# Altium PCB PCB_BlocBatteries.PcbDoc
Units mil, origin at the board's own origin, x right, y up, seen from the top; angles counter-clockwise.
Board outline 3520 x 3375 mil, 2 copper layers (Top Layer, Bottom Layer); 159 components, 92 nets, 463 pads, 20 vias.
Unrouted connection lines stored in the file: 298.
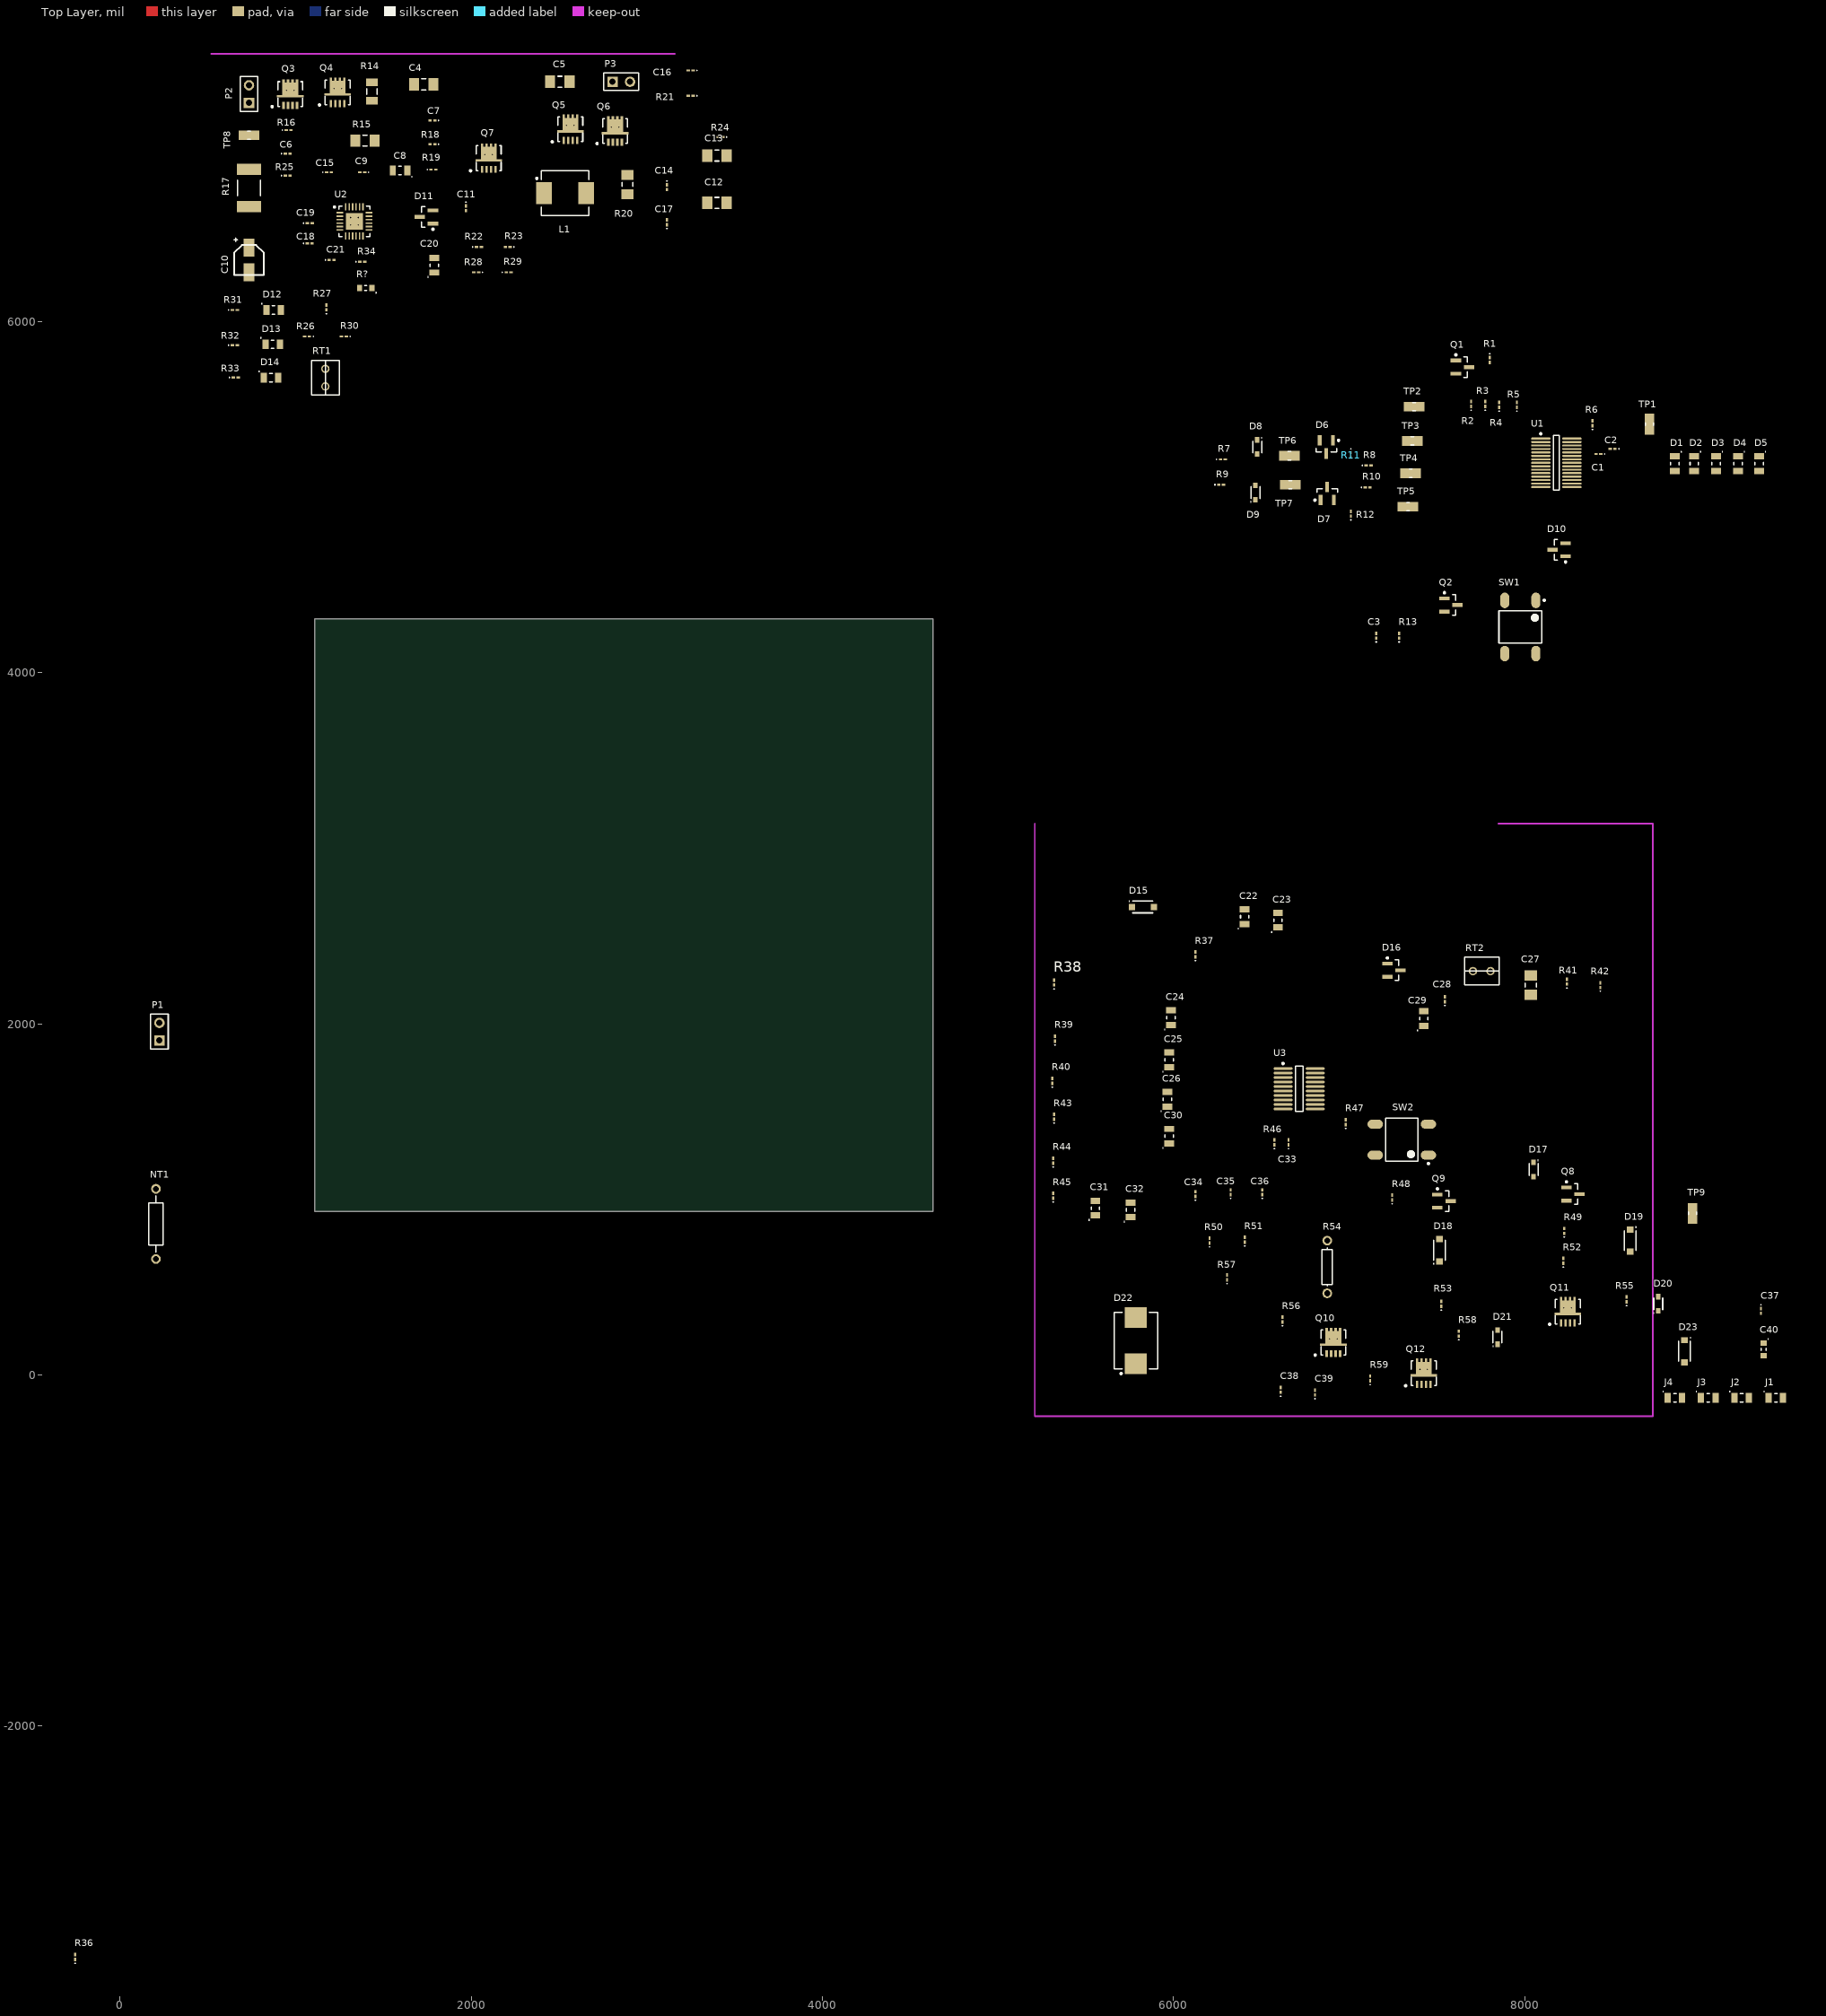
[diagram p0: Top Layer view]
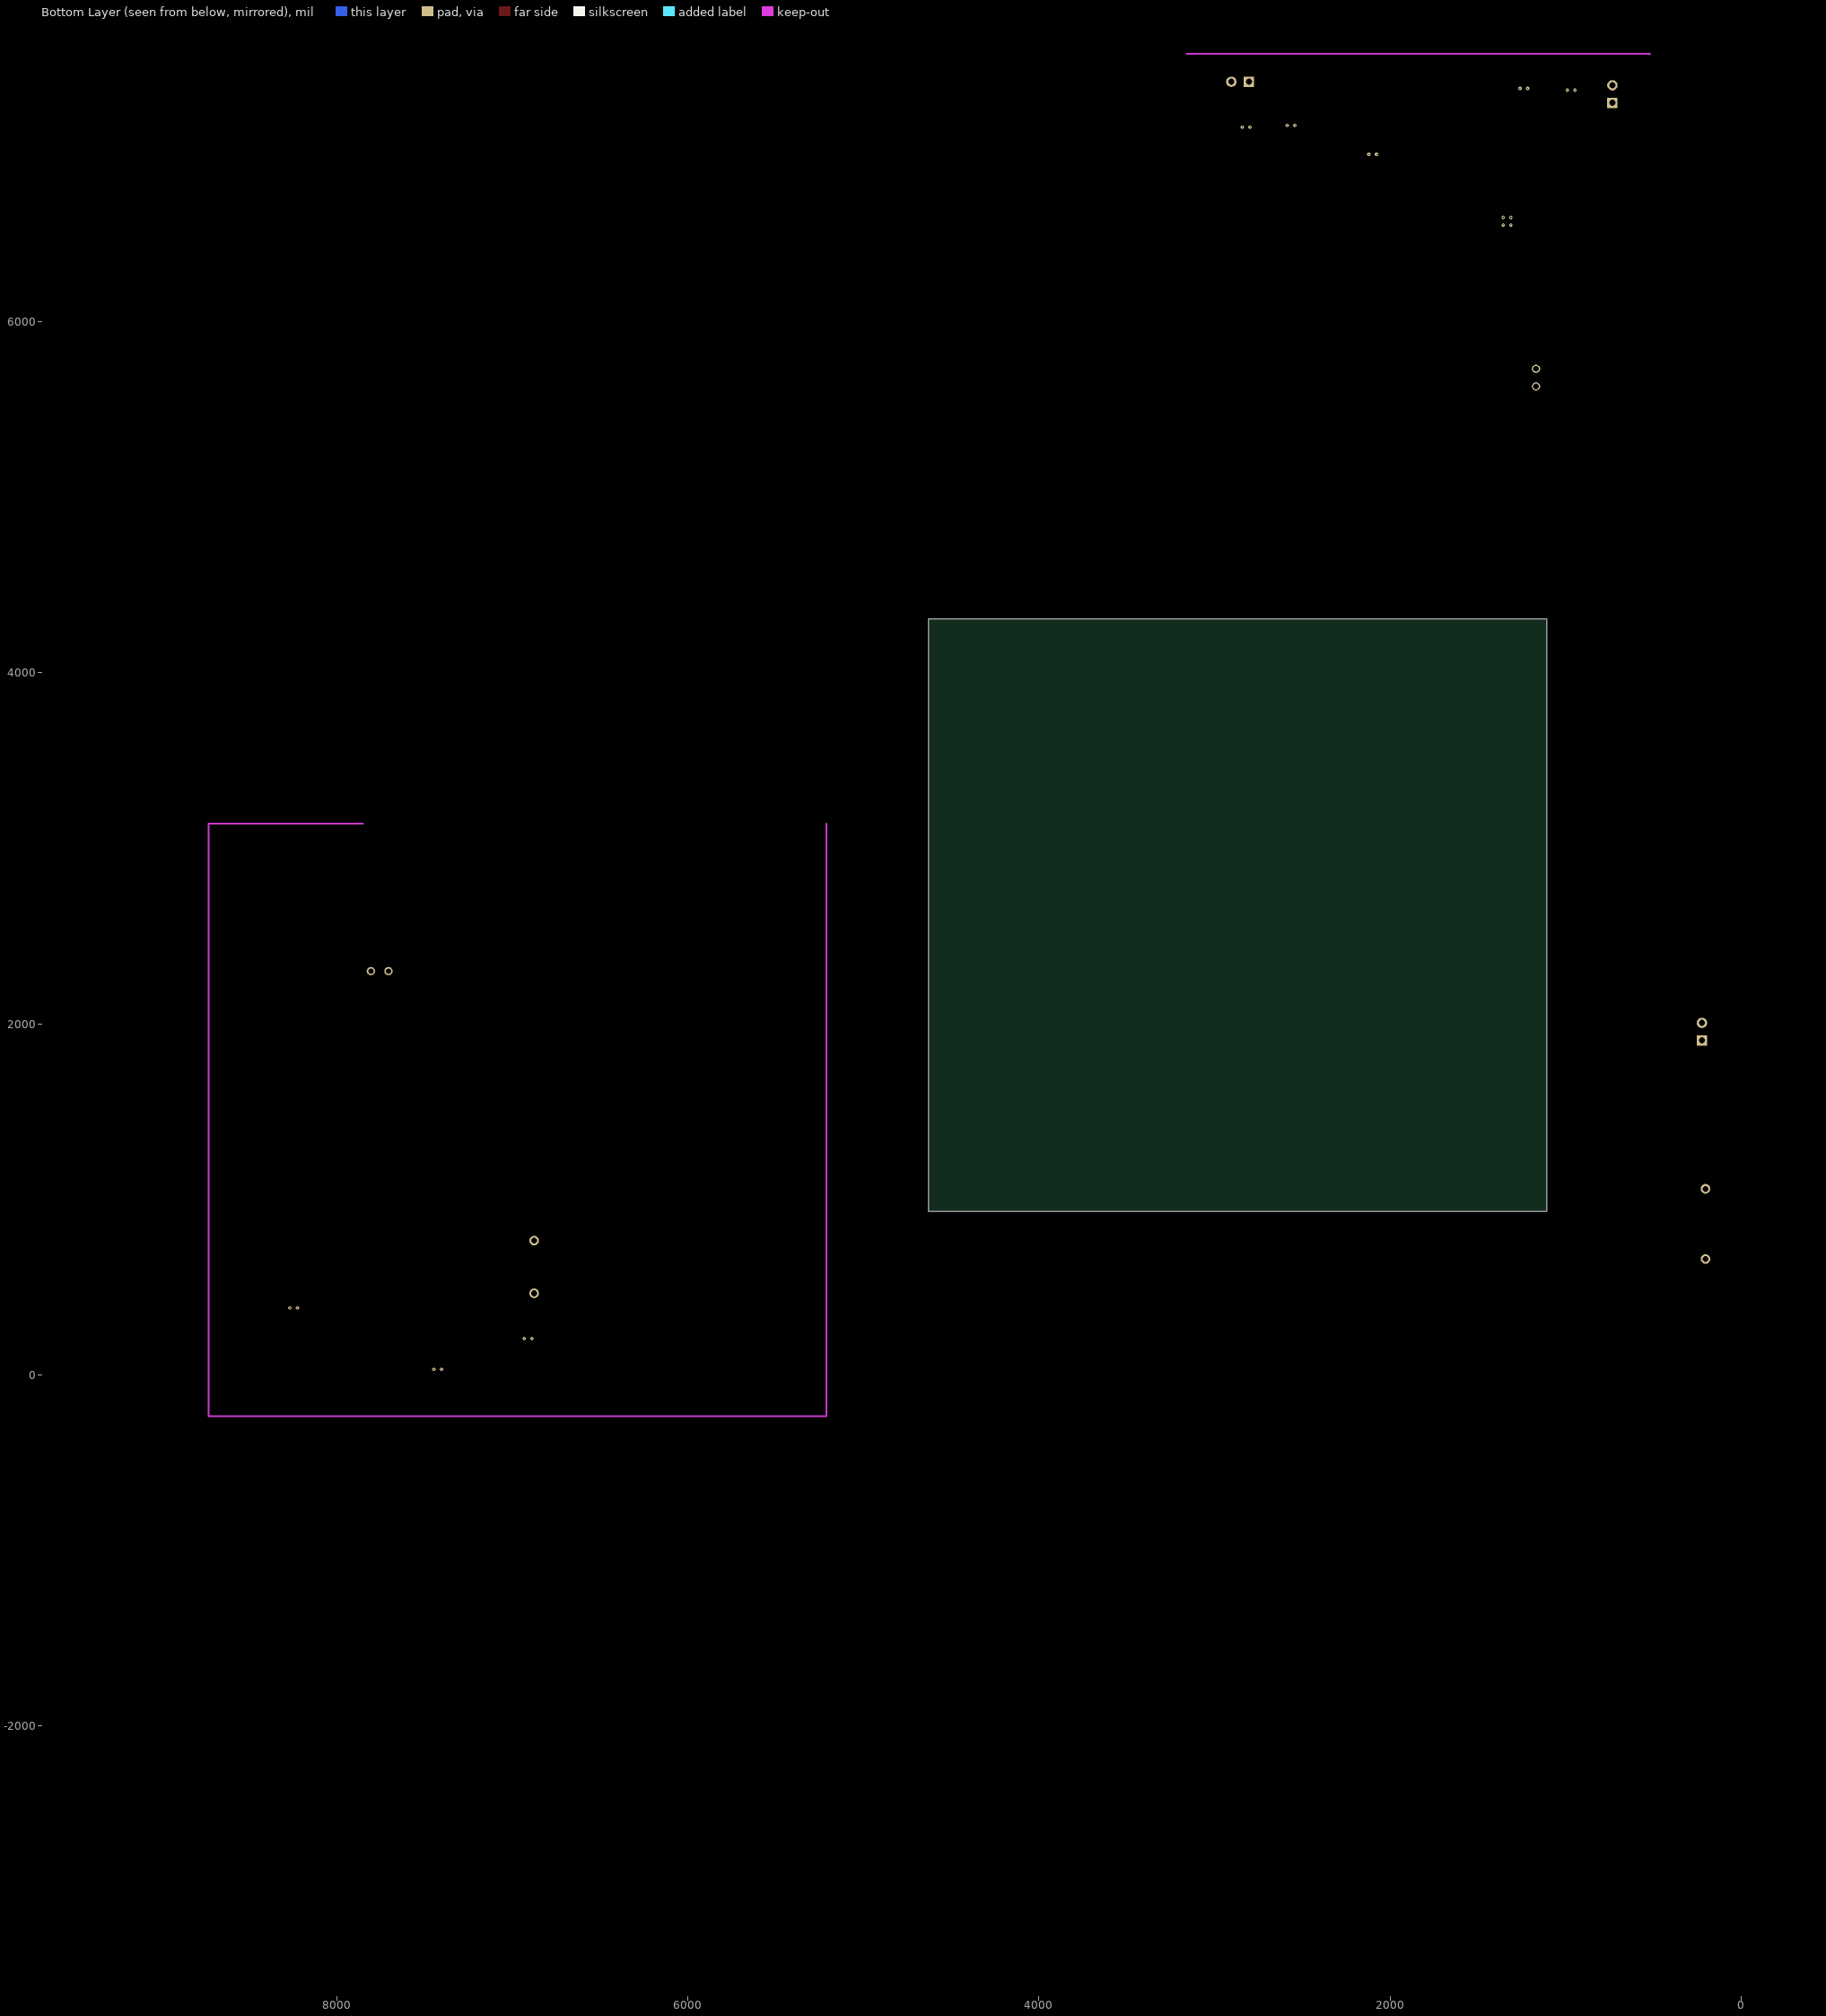
[diagram p1: Bottom Layer view, seen from below]

## Layer stack, top to bottom
Top Solder: solder mask 0.4, Solder Resist, Dk 3.5
Top Layer: signal copper 1.4
Dielectric1: dielectric 12.6, FR-4, Dk 4.8
Bottom Layer: signal copper 1.4
Bottom Solder: solder mask 0.4, Solder Resist, Dk 3.5

## Board outline
1110,930 1110,4305 4630,4305 4630,930

## Design rules (kind name [scope] priority, off if disabled: settings)
Clearance [All] p1: gap=10
PolygonConnect [All] p1: connectstyle=Relief reliefconductorwidth=10 reliefentries=4 polygonreliefangle="90 Angle" airgapwidth=10
RoomDefinition BatteryPack [InComponentClass('BatteryPack')] p1: confinementstyle=ConfineIn formatcopy=TRUE lockcomponents=FALSE outline 8910,845 9105,845 9105,1095 8910,1095
RoutingVias [All] p1: holewidth=28 width=50 viastyle="Through Hole" minholewidth=28 minwidth=50 maxholewidth=28 maxwidth=50
SolderMaskExpansion [All] p1: expansion=4
Width [All] p1: maxlimit=10 minlimit=10 preferedwidth=10
30 further rules are at their usual default settings.

## Classes and differential pairs
component class "Analog Front End": C22 C23 C24 C25 C26 C27 C28 C29 C30 C31 C32 C33 C34 C35 C36 C37 C38 C39 C40 D15 D16 D17 D18 D19 D20 D21 D22 D23 Ptest3 Q8 Q9 Q10 Q11 Q12 R36 R37 R38 R39 R40 R41 R42 R43 R44 R45 R46 R47 R48 R49 R50 R51 R52 R53 R54 R55 R56 R57 R58 R59 R60 RT2 S2 SW2 U3
component class BatteryPack: NT1 P1 P2 P3 TP9
component class Charger: C4 C5 C6 C7 C8 C9 C10 C11 C12 C13 C14 C15 C16 C17 C18 C19 C20 C21 D11 D12 D13 D14 L1 Ptest2 Q3 Q4 Q5 Q6 Q7 R14 R15 R16 R17 R18 R19 R20 R21 R22 R23 R24 R25 R26 R27 R28 R29 R30 R31 R32 R33 R34 R? RT1 TP8 U2
component class Controller: C1 C2 C3 D1 D2 D3 D4 D5 D6 D7 D8 D9 D10 Ptest1 Q1 Q2 R1 R2 R3 R4 R5 R6 R7 R8 R9 R10 R11 R12 R13 SW1 TP1 TP2 TP3 TP4 TP5 TP6 TP7 U1
component class "Li-ion Cells": J1 J2 J3 J4

## Components (designator, comment, footprint, x,y, rotation, side; value= is the part's Value field where it differs from the comment)
C1 "CL10B104KB8SFNC" 0603#1 8420,5245 r180 top
C2 "CL10B104KB8SFNC" 0603#1 8500,5275 r180 top
C3 "CL10B332KB8NNNC" 0603#1 7155,4210 r90 top
C4 "GMK316AB7106KL-TR" 1206 1730,7350 r0 top
C5 "GMK316AB7106KL-TR" 1206 2505,7365 r180 top
C6 "CL10B104KB8SFNC" 0603#1 955,6955 r0 top
C7 "CL10B104KB8SFNC" 0603#1 1780,7145 r180 top
C8 "CL21B105KBFNFNE" 0805 1595,6860 r180 top
C9 "CL10B104KB8SFNC" 0603#1 1380.12,6850 r180 top
C10 "865060640002" "CAP 4.3x4.3mm" 735,6350 r90 top
C11 "CL10B104KB8SFNC" 0603#1 1970,6645 r270 top
C12 "GMK316AB7106KL-TR" 1206 3400,6675 r180 top
C13 "GMK316AB7106KL-TR" 1206 3400,6945 r180 top
C14 "CL10B104KB8SFNC" 0603#1 3115,6765 r270 top
C15 "CL10B104KB8SFNC" 0603#1 1190,6850 r0 top
C16 "CL10C220GB8NNNC" 0603#1 3250,7430 r180 top
C17 "CL10B104KB8SFNC" 0603#1 3115,6565 r90 top
C18 "CL10B104KB8SFNC" 0603#1 1080,6445 r0 top
C19 "CL10B104KB8SFNC" 0603#1 1081.22,6560 r0 top
C20 "CL21B105KBFNFNE" 0805 1790,6320 r90 top
C21 "CL10B563KB8NNNC" 0603#1 1205,6350 r0 top
C22 "CL21B105KBFNFNE" 0805 6405,2610 r90 top
C23 "CL21B105KBFNFNE" 0805 6595,2590 r90 top
C24 "CL21B105KBFNFNE" 0805 5985,2035 r90 top
C25 "CL21B105KBFNFNE" 0805 5975,1795 r90 top
C26 "CL21B105KBFNFNE" 0805 5965,1570 r90 top
C27 "CL31B475KBHNNNE" 1206 8035,2220 r90 top
C28 "CL10B472KB8NNNC" 0603#1 7545,2140 r90 top
C29 "CL21B105KBFNFNE" 0805 7425,2030 r90 top
C30 "CL21B105KBFNFNE" 0805 5975,1360 r90 top
C31 "CL21B105KBFNFNE" 0805 5555,950 r90 top
C32 "CL21B105KBFNFNE" 0805 5755,940 r90 top
C33 "CL10B471KB8NNNC" 0603#1 6655,1325 r90 top
C34 "CL10B104KB8SFNC" 0603#1 6125,1030 r90 top
C35 "CL10B104KB8SFNC" 0603#1 6325,1040 r90 top
C36 "CL10B104KB8SFNC" 0603#1 6505,1040 r90 top
C37 "CL10B104KB8SFNC" 0603#1 9345,365 r270 top
C38 "CL10B104KB8SFNC" 0603#1 6610,-85 r90 top
C39 "CL10B104KB8SFNC" 0603#1 6805,-100 r90 top
C40 "CL10B104KB8SFNC" 0603#2 9360,145 r270 top
D1 "LG R971-KN-1" 0805 8855,5190 r270 top
D2 "LG R971-KN-1" 0805 8965,5190 r270 top
D3 "LG R971-KN-1" 0805 9090,5190 r270 top
D4 "LG R971-KN-1" 0805 9215,5190 r270 top
D5 "LG R971-KN-1" 0805 9335,5190 r270 top
D6 "BAV99LT1G" SOT-23-3 6870,5285 r270 top
D7 "BAV99LT1G" SOT-23-3 6875,5020 r90 top
D8 "MMSZ5232BS-7-F" SOD-323F 6476.22,5285 r270 top
D9 "MMSZ5232BS-7-F" SOD-323F 6466.22,5025.35 r90 top
D10 "BAV99LT1G" SOT-23-3 8195,4700 r180 top
D11 "BAT54SLT1G" SOT-23-3 1745,6595 r180 top
D12 "LG R971-KN-1" 0805 875,6065 r0 top
D13 "LG R971-KN-1" 0805 870,5870 r0 top
D14 "LG R971-KN-1" 0805 860,5680 r0 top
D15 "1N4148W-7-F" SOD123 5825,2665 r0 top
D16 "BAV99LT1G" SOT-23-3 7255,2305 r0 top
D17 "DZ2J180M0L" SOD-323F 8050,1170 r270 top
D18 "1N4148W-7-F" SOD123 7515,710 r90 top
D19 "1N4148W-7-F" SOD123 8600,765 r270 top
D20 "DZ2J160M0L" SOD-323F 8760,405 r90 top
D21 "DZ2J100M0L" SOD-323F 7845,215 r90 top
D22 "SMCJ28A-TR" SMC 5785,195 r90 top
D23 "1N4148W-7-F" SOD123 8910,135 r270 top
J1 "jumper" 0805 9430,-130 r0 top
J2 "jumper" 0805 9235,-130 r0 top
J3 "jumper" 0805 9045,-130 r0 top
J4 "jumper" 0805 8855,-130 r0 top
L1 "IHLP2525CZER6R8M11" INDM6965X30N 2535,6730 r0 top
NT1 "Res2" AXIAL-0.4 205,860 r90 top
P1 "Header 2" HDR1X2 225,1905 r90 top
P2 "Header 2" HDR1X2 735,7245 r90 top
P3 "Header 2" HDR1X2 2805,7365 r0 top
Q1 "BSS84-7-F" SOT-23-3 7645,5740 r0 top
Q2 "BSS138" SOT-23-3 7580,4385 r0 top
Q3 "SI7617DN-T1-GE3" "PowerPAK 1212-8" 970,7295 r0 top
Q4 "SI7617DN-T1-GE3" "PowerPAK 1212-8" 1240,7305 r0 top
Q5 "SI7617DN-T1-GE3" "PowerPAK 1212-8" 2565,7095 r0 top
Q6 "SI7114ADN-T1-GE3" "PowerPAK 1212-8" 2820,7085 r0 top
Q7 "SI7114ADN-T1-GE3" "PowerPAK 1212-8" 2100,6930 r0 top
Q8 "BSS84-7-F" SOT-23-3 8275,1030 r0 top
Q9 "MMBTA92LT1G" SOT-23-3 7540,990 r0 top
Q10 "SI7114ADN-T1-GE3" "PowerPAK 1212-8" 6910,185 r0 top
Q11 "SI7114ADN-T1-GE3" "PowerPAK 1212-8" 8245,360 r0 top
Q12 "SI7114ADN-T1-GE3" "PowerPAK 1212-8" 7425,10 r0 top
R1 "RC0603JR-07100KL" 0603#1 7800,5780 r270 top
R2 "RG1608P-304-B-T5" 0603#1 7695,5530 r90 top
R3 "RC0603JR-07100KL" 0603#1 7775,5530 r90 top
R4 "RC0603FR-071ML" 0603#1 7855,5525 r90 top
R5 "RC0603FR-07221KL" 0603#1 7955,5525 r90 top
R6 "RC0603JR-07100KL" 0603#1 8385,5420 r90 top
R7 "RC0603FR-07100RL" 0603#1 6281.22,5215 r0 top
R8 "RC0603FR-07100RL" 0603#1 7110.63,5180 r0 top
R9 "RC0603FR-07100RL" 0603#1 6271.22,5070 r0 top
R10 "RC0603FR-07100RL" 0603#1 7105,5055 r0 top
R11 "RC0603FR-071ML" 0603#1 7010,5240 r270 top
R12 "RC0603FR-071ML" 0603#1 7010,4905 r90 top
R13 "RC0603FR-0713K7L" 0603#1 7285,4210 r90 top
R14 "ESR03EZPJ100" c1206 1435,7310 r90 top
R15 "RU3216FR010CS" 1206 1395.12,7030 r0 top
R16 "RC0603JR-07100KL" 0603#1 960,7090 r0 top
R17 "CRCW25122R00JNEG" 2512 735,6760 r90 top
R18 "RC0603JR-07100KL" 0603#1 1780,7010 r180 top
R19 "RC0603JR-071KL" 0603#1 1785,6865 r0 top
R20 "RU3216FR010CS" 1206 2890,6780 r270 top
R21 "RC0603FR-07698KL" 0603#1 3250,7285 r180 top
R22 "RC0603JR-07100KL" 0603#1 2043.78,6425 r0 top
R23 "RC0603JR-07100KL" 0603#1 2208.78,6425 r180 top
R24 "RC0603JR-07100KL" 0603#1 3420,7050 r180 top
R25 "RC0603JR-0710KL" 0603#1 955,6830 r0 top
R26 "RC0603FR-079K31L" 0603#1 1065,5915 r180 top
R27 "RC0603FR-07100RL" 0603#1 1175,6080 r90 top
R28 "RC0603JR-0710KL" 0603#1 2028.78,6280 r180 top
R29 "RC0603FR-0732K4L" 0603#1 2213.78,6280 r0 top
R30 "RC0603FR-07430KL" 0603#1 1275,5915 r180 top
R31 "RC0603JR-0710KL" 0603#1 655,6065 r0 top
R32 "RC0603JR-0710KL" 0603#1 655,5865 r0 top
R33 "RC0603JR-0710KL" 0603#1 660,5680 r0 top
R34 "RC0603JR-07100KL" 0603#1 1380,6340 r0 top
R36 "RC0603FR-07100RL" 0603#1 -255,-3315 r90 top
R37 "RC0603JR-0710KL" 0603#1 6125,2395 r90 top
R38 "RC0603FR-07100RL" 0603#1 5320,2235 r90 top
R39 "RC0603FR-07100RL" 0603#1 5325,1915 r90 top
R40 "RC0603FR-07100RL" 0603#1 5310,1675 r90 top
R41 "RC0603JR-0710KL" 0603#1 8240,2240 r90 top
R42 "RC0603JR-0710KL" 0603#1 8430,2220 r90 top
R43 "RC0603FR-07100RL" 0603#1 5320,1470 r90 top
R44 "RC0603FR-07100RL" 0603#1 5315,1220 r90 top
R45 "RC0603FR-07100RL" 0603#1 5315,1020 r90 top
R46 "RC0603FR-07499KL" 0603#1 6575,1325 r90 top
R47 "RC0603FR-073K01L" 0603#1 6980,1440 r90 top
R48 "RC0603JR-0710KL" 0603#1 7245,1010 r90 top
R49 "RC0603JR-07100KL" 0603#1 8225,820 r90 top
R50 "RC0603FR-07100RL" 0603#1 6205,765 r90 top
R51 "RC0603FR-07100RL" 0603#1 6405,770 r90 top
R52 "RC0603FR-071ML" 0603#1 8220,650 r90 top
R53 "RC0603JR-0710KL" 0603#1 7525,405 r90 top
R54 "Res1" AXIAL-0.3 6875,615 r90 top
R55 "RC0603FR-071ML" 0603#1 8580,430 r90 top
R56 "RC0603FR-071ML" 0603#1 6620,315 r90 top
R57 "CRA2512-FZ-R020ELF" 0603#1 6305,555 r90 top
R58 "RC0603FR-071ML" 0603#1 7625,235 r90 top
R59 "RC0603JR-071KL" 0603#1 7120,-20 r90 top
R? "RC0603FR-0722KL" 0603#2 1400,6190 r180 top
RT1 "NTCLE100E3103HT1" NTCLE100E3 1170,5730 r270 top
RT2 "NTCLE100E3103HT1" NTCLE100E3 7705,2300 r0 top
SW1 "PTS645SK50SMTR92 LFS" "6 mm Tact Switches" 7975,4260 r270 top
SW2 "PTS645SM43SMTR92 LFS" "6 mm Tact Switches" 7300,1340 r180 top
TP1 "testpoint" "0805 testpoint" 8710,5415 r90 top
TP2 "testpoint" "0805 testpoint" 7370,5515 r0 top
TP3 "testpoint" "0805 testpoint" 7360,5320 r180 top
TP4 "testpoint" "0805 testpoint" 7350,5135 r180 top
TP5 "testpoint" "0805 testpoint" 7335,4945 r180 top
TP6 "testpoint" "0805 testpoint" 6660,5235 r180 top
TP7 "testpoint" "0805 testpoint" 6665,5070 r180 top
TP8 "testpoint" "0805 testpoint" 735,7060 r180 top
TP9 "testpoint" "0805 testpoint" 8955,920 r90 top
U1 "BQ78350DBT-R1" TSSOP-30 8180,5195 r0 top
U2 "BQ24610RGER" VQFN-24 1335,6570 r0 top
U3 "BQ7692003PWR" TSSOP-20 6715,1630 r0 top

## Footprints (in the part's own frame and the unit in brackets; to place one, negate y for a bottom-side part, rotate by r counter-clockwise, add the part's x,y. Pads: shape width x height; smd on the part's side, far side on the other; paste and mask are expansions set on the pad)
"6 mm Tact Switches" [mm] "SOP, 4-Leads, Body 6,20x6,20mm, Pitch 4,50mm, IPC Medium Density"
  oval 2.25x1.3 smd: 1(-3.85,2.25) 2(-3.85,-2.25) 3(3.85,-2.25) 4(3.85,2.25)
  silkscreen extent -3.97,-3.1 2.32,3.58, body extent -3.1,-3.1 3.1,3.1, height 3.5
0603#1 [mm] "Chip Inductor, Body 0.6x0.3mm, IPC High Density"
  rect 0.5x0.3 smd: 1(-0.35,0) 2(0.35,0)
  silkscreen extent -0.9,-0.05 -0.9,0.05, body extent -0.33,-0.18 0.33,0.18, height 0.55
0603#2 [mm] "Chip 2-Leads, Body 1,60x0,80mm, IPC Medium Density"
  rect 0.77x0.92 smd: 1(-0.895,0) 2(0.895,0)
  silkscreen extent -1.54,-0.36 0.15,0.72, body extent -0.8,-0.4 0.8,0.4, height 1
0805 [mm] "Chip Capacitor, 2-Leads, Body 2,00x1,25mm, IPC Medium Density"
  rect 0.9x1.4 smd: 1(-1.05,0) 2(1.05,0)
  silkscreen extent -1.76,-0.6 0.2,0.96, body extent -1,-0.63 1,0.63, height 0.8
"0805 testpoint" [mm] "Chip Capacitor, 2-Leads, Body 2,00x1,25mm, IPC Medium Density"
  rect 3x1.4 smd: 1(0,0)
  silkscreen extent -0.2,-0.6 0.2,0.6, body extent -1,-0.63 1,0.63, height 0.8
1206 [mm] "Chip Resistor, 2-Leads, Body 3,20x1,58mm, IPC Medium Density"
  rect 1.45x1.8 smd: 1(-1.4,0) 2(1.4,0)
  silkscreen extent -0.3,-0.8 0.3,0.8, body extent -1.7,-0.89 1.7,0.89, height 0.85
2512 [mm] "Chip Resistor, 2-Leads, Body 6,30x3,20mm, IPC Medium Density"
  rect 1.6x3.5 smd: 1(-2.7,0) 2(2.7,0)
  silkscreen extent -1.15,-1.65 1.15,1.65, body extent -3.15,-1.6 3.15,1.6, height 0.6
AXIAL-0.3 [mm] "Axial Device, Thru-Hole; 2 Leads; 0.3 in Pin Spacing"
  round 1.4 hole 0.85: 1(-3.81,0) 2(3.81,0)
  silkscreen extent -2.77,-0.76 2.77,0.76
AXIAL-0.4 [mm] "Axial Device, Thru-Hole; 2 Leads; 0.4 in Pin Spacing"
  round 1.4 hole 0.85: 1(-5.08,0) 2(5.08,0)
  silkscreen extent -4.06,-1.02 4.06,1.02
c1206 [mm] "Chip Capacitor, Body 3.2x1.6mm, IPC High Density"
  rect 1.1x1.7 smd: 1(-1.35,0) 2(1.35,0)
  silkscreen extent -0.4,-0.75 0.4,0.75, body extent -1.7,-0.9 1.7,0.9, height 1.3
"CAP 4.3x4.3mm" [mm] "Chip"
  rect 2.6x1.6 smd: 1(1.8,0) 2(-1.8,0)
  silkscreen extent -2.15,-2.15 3.17,2.16, body extent -2.13,-2.15 2.15,2.14, height 5.5
HDR1X2 [mm] "Connector; Header; 2 Position"
  rect 1.5x1.5 hole 0.9: 1(0,0)
  round 1.5 hole 0.9: 2(2.54,0)
  silkscreen extent -1.27,-1.27 3.81,1.27
INDM6965X30N [mm] "Molded Inductor, 2-Leads, Body 6,86x6,47mm, IPC Medium Density"
  rect 2.25x3.2 smd: 1(-3.05,0) 2(3.05,0)
  silkscreen extent -4.22,-3.25 3.45,3.25, body extent -3.43,-3.23 3.43,3.23, height 3
NTCLE100E3 [mm]
  round 1.2 hole 0.8: 1(0,0) 2(2.54,0)
  silkscreen extent -1.23,-2 3.77,2
"PowerPAK 1212-8" [mm] "QFN, 10-Leads, Body 3,30x3,30mm, Pitch 0,65mm, Thermal Pad 2,11x2,11mm, IPC Medium Density"
  rect 0.35x1 smd: 1(-0.975,-1.63) 2(-0.325,-1.63) 3(0.325,-1.63) 4(0.975,-1.63) 5(-0.975,1.63) 5(-0.325,1.63) 5(0.325,1.63) 5(0.975,1.63)
  rect 1x0.35 smd: 5(-1.425,-0.325) 5(1.425,-0.325)
  rect 2.3x2.15 smd: 5(0,0.575)
  silkscreen extent -2.75,-1.95 1.8,1.8, body extent -1.65,-1.65 1.65,1.65, height 1.04
SMC [mm] "Molded Diode, 2-Leads, Body 7,95x5,90mm, IPC Medium Density"
  rect 3x3.15 smd: 1(-3.35,0) 2(3.35,0)
  silkscreen extent -4.87,-3.15 4.1,3.15, body extent -4.08,-3.13 4.07,3.13, height 2.45
SOD123 [mm] "Molded Diode, 2-Leads, Body 2,70x1,55mm, IPC Medium Density"
  rect 0.9x0.95 smd: 1(-1.6,0) 2(1.6,0)
  silkscreen extent -2,-0.85 1.45,0.9, body extent -1.42,-0.85 1.43,0.85, height 1.45
SOD-323F [mm] "Molded Diode, 2-Leads, Body 1,70x1,25mm, IPC Medium Density"
  rect 0.8x0.65 smd: 1(-1.025,0) 2(1.025,0)
  silkscreen extent -1.37,-0.65 0.85,0.7, body extent -0.85,-0.63 0.85,0.63, height 0.7
SOT-23-3 [mm] "SOT23, 3-Leads, Body 2,90x2,45mm, Pitch 0,95mm, IPC Medium Density"
  rect 1.5x0.55 smd: 1(-0.95,0.95) 2(-0.95,-0.95) 3(0.95,0)
  silkscreen extent -1.07,-1.5 0.7,1.9, body extent -0.7,-1.5 0.7,1.5, height 1.1
TSSOP-20 [mm] "TSOP, 20-Leads, Body 6,50x4,40mm, Pitch 0,65mm, IPC Medium Density"
  oval 2.75x0.35 smd: 1(-2.325,2.925) 2(-2.325,2.275) 3(-2.325,1.625) 4(-2.325,0.975) 5(-2.325,0.325) 6(-2.325,-0.325) 7(-2.325,-0.975) 8(-2.325,-1.625) 9(-2.325,-2.275) 10(-2.325,-2.925) 11(2.325,-2.925) 12(2.325,-2.275) 13(2.325,-1.625) 14(2.325,-0.975) 15(2.325,-0.325) 16(2.325,0.325) 17(2.325,0.975) 18(2.325,1.625) 19(2.325,2.275) 20(2.325,2.925)
  silkscreen extent -2.45,-3.3 0.55,3.77, body extent -2.25,-3.3 2.25,3.3, height 1.2
TSSOP-30 [mm] "TSSOP, 30-Leads, Body 7,80x4,40mm, Pitch 0,50mm, IPC Medium Density"
  oval 2.8x0.3 smd: 1(-2.25,3.5) 2(-2.25,3) 3(-2.25,2.5) 4(-2.25,2) 5(-2.25,1.5) 6(-2.25,1) 7(-2.25,0.5) 8(-2.25,0) 9(-2.25,-0.5) 10(-2.25,-1) 11(-2.25,-1.5) 12(-2.25,-2) 13(-2.25,-2.5) 14(-2.25,-3) 15(-2.25,-3.5) 16(2.25,-3.5) 17(2.25,-3) 18(2.25,-2.5) 19(2.25,-2) 20(2.25,-1.5) 21(2.25,-1) 22(2.25,-0.5) 23(2.25,0) 24(2.25,0.5) 25(2.25,1) 26(2.25,1.5) 27(2.25,2) 28(2.25,2.5) 29(2.25,3) 30(2.25,3.5)
  silkscreen extent -2.37,-3.95 0.45,4.32, body extent -2.25,-3.95 2.25,3.95, height 1.2
VQFN-24 [mm] "QFN, 24-Leads, Body 4,00x4,00mm, Pitch 0,50mm, Thermal Pad 2,45x2,45mm, IPC Medium Density"
  rect 1x0.23 smd: 1(-2.1,1.25) 2(-2.1,0.75) 3(-2.1,0.25) 4(-2.1,-0.25) 5(-2.1,-0.75) 6(-2.1,-1.25) 13(2.1,-1.25) 14(2.1,-0.75) 15(2.1,-0.25) 16(2.1,0.25) 17(2.1,0.75) 18(2.1,1.25)
  rect 0.23x1 smd: 7(-1.25,-2.1) 8(-0.75,-2.1) 9(-0.25,-2.1) 10(0.25,-2.1) 11(0.75,-2.1) 12(1.25,-2.1) 19(1.25,2.1) 20(0.75,2.1) 21(0.25,2.1) 22(-0.25,2.1) 23(-0.75,2.1) 24(-1.25,2.1)
  rect 2.45x2.45 smd: 25(0,0)
  silkscreen extent -3,-2.22 2.22,2.22, body extent -2.07,-2.07 2.07,2.07, height 0.8

## Part data
C1 C2 C6 C7 C9 C11 C14 C15 C17 C18 C19 C34 C35 C36 C37 C38 C39 C40: "CAP CER 0.1UF 50V X7R 0603"
C3: "CAP CER 3300PF 50V X7R 0603"
C4 C5 C12 C13: "CAP CER 10UF 35V X7R 1206"
C8 C20 C22 C23 C24 C25 C26 C29 C30 C31 C32: "CAP CER 1UF 50V X7R 0805"
C10: "CAP 2.2 UF 20% 50 V"
C16: "CAP CER 22PF 50V NP0 0603"
C21: "CAP CER 0.056UF 50V X7R 0603"
C27: "CAP CER 4.7UF 50V X7R 1206"
C28: "CAP CER 4700PF 50V X7R 0603"
C33: "CAP CER 470PF 50V X7R 0603"
D1 D2 D3 D4 D5 D12 D13 D14: "LED GREEN DIFFUSED 0805 SMD"
D6 D7 D10 D16: "DIODE ARRAY GP 70V 215MA SOT23-3"
D8 D9: "DIODE ZENER 5.6V 200MW SOD323"
D11: "DIODE ARRAY SCHOTTKY 30V SOT23-3"
D15 D18 D19 D23: "DIODE GEN PURP 100V 300MA SOD123"
D17: "DIODE ZENER 18V 200MW SMINI2"
D20: "DIODE ZENER 16V 200MW SMINI2"
D21: "DIODE ZENER 10V 200MW SMINI2"
D22: "TVS DIODE 28VWM 59VC SMC"
L1: "FIXED IND 6.8UH 5.5A 46.8 MOHM"
NT1 R54: "Resistor"
P1 P2 P3: "Header, 2-Pin"
Q1 Q8: "MOSFET P-CH 50V 130MA SOT23-3"
Q2: "MOSFET N-CH 50V 220MA SOT-23"
Q3 Q4 Q5: "MOSFET P-CH 30V 35A 1212-8 PPAK"
Q6 Q7 Q10 Q11 Q12: "MOSFET N-CH 30V 35A PPAK 1212-8"
Q9: "TRANS PNP 300V 0.5A SOT23"
R1 R3 R6 R16 R18 R22 R23 R24 R34 R49: "RES SMD 100K OHM 5% 1/10W 0603"
R2: "RES SMD 300K OHM 0.1% 1/10W 0603"
R4 R11 R12 R52 R55 R56 R58: "RES SMD 1M OHM 1% 1/10W 0603"
R5: "RES SMD 221K OHM 1% 1/10W 0603"
R7 R8 R9 R10 R27 R36 R38 R39 R40 R43 R44 R45 R50 R51: "RES SMD 100 OHM 1% 1/10W 0603"
R13: "RES SMD 13.7K OHM 1% 1/10W 0603"
R14: "RES SMD 10 OHM 5% 1/4W 0603"
R15 R20: "RES SMD 0.01 OHM 1% 1/2W 1206"
R17: "RES SMD 2 OHM 5% 1W 2512"
R19 R59: "RES SMD 1K OHM 5% 1/10W 0603"
R21: "RES SMD 698K OHM 1% 1/10W 0603"
R25 R28 R31 R32 R33 R37 R41 R42 R48 R53: "RES SMD 10K OHM 5% 1/10W 0603"
R26: "RES SMD 9.31K OHM 1% 1/10W 0603"
R29: "RES SMD 32.4K OHM 1% 1/10W 0603"
R30: "RES SMD 430K OHM 1% 1/10W 0603"
R46: "RES SMD 499K OHM 1% 1/10W 0603"
R47: "RES SMD 3.01K OHM 1% 1/10W 0603"
R57: "RES SMD 0.02 OHM 1% 3W 2512"
R?: "RES SMD 22K OHM 1% 1/10W 0603"
RT1 RT2: "THERMISTOR NTC 10K 3% RADIAL"
SW1 SW2: "SWITCH TACTILE SPST-NO 0.05A 12V"
TP1 TP2 TP3 TP4 TP5 TP6 TP7 TP8 TP9: "Testpoint"
U1: "IC BATTERY MGMT CTRLR 30TSSOP"
U2: "IC SYNC SW-MODE BAT CHRGR 24VQFN"
U3: "IC BATT MGMT LI-ION AFE 20TSSOP"

## Via types
v1: diameter 19.68, hole 7.87, Top Layer to Bottom Layer, 20 vias

## Nets (pads, with @x,y where several pads share a name; then routed paths per layer and width w, separated by ;. In a path a pad name is that pad's centre, name@x,y a point inside that pad or via, vN(x,y) a via of type N, cw(c..) or ccw(c..) an arc to the next point about the centre after c; other vN are vias at no path point)
0V: C1.1 C2.1 C3.1 C22.1 C23.1 C27.1 C28.1 C29.1 C31.1 C32.1 C33.1 C34.2 C36.1 D6.1 D7.1 D10.1 D16.1 D17.1 NT1.1 Q2.3 Q8.1 R11.1 R12.1 R13.1 R46.1 RT2.2 SW1.1 U1.6 U1.8 U1.9 U1.21 U1.22 U1.23 U1.25 U1.28 U1.30 U3.3
C1: R47.1
NetB1_1: D8.1 D9.1 D22.1 NT1.2 R45.1 R50.1 R57.1
NetB1_2: R43.1
NetB1_4: J1.2 J3.1
NetB1_6: C12.2 C13.2 C14.1 C16.2 C40.2 D15.1 D22.2 D23.2 J1.1 J2.2 J3.2 Q1.3 Q5.2 R1.2 R20.1 R21.2 R37.1 R38.1 U2.13
NetB1_7: J2.1 J4.2
NetB1_9: R44.1
NetC1_2: C1.2 C27.2 D1.1 D2.1 D3.1 D4.1 D5.1 D6.2 D7.2 D10.2 D16.2 Q9.3 R4.2 R5.2 R6.2 R41.2 R42.2 TP1.1 U1.26 U3.8
NetC2_2: C2.2 U1.27
NetC3_2: C3.2 R2.1 R13.2 U1.7
NetC4_2: C4.2 C5.2 C7.2 C9.1 P2.1 Q5.3 Q6.2 R15.2 R18.2 U2.1
NetC6_1: C6.1 Q3.1 Q4.1 R16.1 R25.1
NetC6_2: C6.2 Q3.3 Q4.3 R14.1 R16.2
NetC7_1: C7.1 Q5.1 R18.1 R19.2
NetC8_2: C8.2 R14.2 U2.24
NetC9_2: C9.2 C15.2 Q4.2 R15.1 U2.2
NetC10_1: C10.1 R17.1
NetC11_1: C11.1 L1.1 Q6.3 Q7.2 U2.20
NetC11_2: C11.2 D11.2 U2.22
NetC14_2: C14.2 C17.2 L1.2 R20.2 U2.14
NetC16_1: C16.1 R21.1 R24.2 U2.12
NetC18_2: C18.2 R27.2 U2.6
NetC20_2: C20.2 D11.1 U2.18
NetC21_2: C21.2 U2.7
NetC22_2: C22.2 C23.2 R36.2 U3.9 U3.10
NetC24_1: C24.1 C25.2 R39.2 U3.13
NetC24_2: C24.2 R38.2 U3.12
NetC25_1: C25.1 C26.2 R40.2 U3.14
NetC26_1: C26.1 C30.2 R43.2 U3.15
NetC28_2: C28.2 D16.3 RT2.1 SW2.2 U3.6
NetC29_2: C29.2 U3.7
NetC30_1: C30.1 C32.2 R44.2 U3.16
NetC31_2: C31.2 R45.2 U3.17
NetC33_2: C33.2 R46.2 TP2.1 U1.2 U3.20
NetC34_1: C34.1 C35.2 R50.2 U3.18
NetC35_1: C35.1 C36.2 R51.2 U3.19
NetC37_2: C37.2 C40.1
NetC38_1: C38.1 C39.2
NetC38_2: C38.2 Q10.3 R51.1 R56.1 R57.2
NetD1_2: D1.2 U1.20
NetD2_2: D2.2 U1.19
NetD3_2: D3.2 U1.18
NetD4_2: D4.2 U1.17
NetD5_2: D5.2 U1.16
NetD6_3: D6.3 D8.2 R7.2 R8.1 R11.2 TP6.1
NetD7_3: D7.3 D9.2 R9.2 R10.1 R12.2 TP7.1
NetD10_3: D10.3 R5.1 SW1.2 U1.14
NetD12_1: D12.1 R31.2
NetD12_2: D12.2 U2.5
NetD13_1: D13.1 R32.2
NetD13_2: D13.2 U2.9
NetD14_1: D14.1 R33.2
NetD14_2: D14.2 U2.8
NetD15_2: D15.2 R36.1 R37.2
NetD17_2: D17.2 Q8.3 U3.2
NetD18_1: D18.1 Q9.1
NetD18_2: D18.2 R53.2
NetD19_1: D19.1 R49.1 R52.2
NetD19_2: D19.2 D20.2 Q11.1 R52.1 R55.2
NetD21_2: D21.2 Q12.1 R53.1 R58.2
NetJ4_1: J4.1 R40.1
NetP1_1: P1.1 R9.1
NetP1_2: P1.2 R7.1
NetP3_2: P3.2 Q3.2 R17.2 R31.1 R32.1 R33.1 TP8.1
NetQ1_1: Q1.1 R1.1 R3.2
NetQ1_2: Q1.2 R2.2
NetQ2_1: Q2.1 R4.1 U1.12
NetQ2_2: Q2.2 R3.1
NetQ6_1: Q6.1 U2.21
  other v1: 2798.35,7106.65 2841.65,7106.65
NetQ7_1: Q7.1 U2.19
  other v1: 2078.35,6951.65 2121.65,6951.65
NetQ8_2: Q8.2 R49.2
NetQ9_2: Q9.2 R48.1
NetQ10_1: Q10.1 R54.1 R56.2
NetQ10_2: Q10.2 Q11.2 R59.1
NetQ12_2: Q12.2 R59.2
NetR6_1: R6.1 U1.24
NetR8_2: R8.2 U1.11
NetR10_2: R10.2 U1.13
NetR19_1: R19.1 U2.23
NetR22_1: R22.1 R28.2 U2.15
NetR23_1: R23.1 R29.2 U2.16
NetR25_2: R25.2 U2.3
NetR26_1: R26.1 R27.1 R30.2 RT1.1
NetR34_1: R34.1 R?.2 U2.11
NetR39_1: R39.1
NetR41_1: R41.1 TP4.1 U1.4 U3.5
NetR42_1: R42.1 TP3.1 U1.3 U3.4
NetR48_2: R48.2 TP5.1 U1.5
NetR54_2: R54.2 U3.1
PGND: C4.1 C5.1 C8.1 C10.2 C12.1 C13.1 C15.1 C17.1 C18.1 C19.1 C20.1 C21.1 C37.1 C39.1 D20.1 D21.1 D23.1 P2.2 P3.1 Q7.3 Q11.3 Q12.3 R24.1 R28.1 R29.1 R30.1 R55.1 R58.1 R?.1 RT1.2 TP9.1 U2.17
VREF: C19.2 R22.2 R23.2 R26.2 R34.2 U2.4 U2.10
pads on no net: D11.3 Q3.4 Q3.5 Q4.4 Q4.5 Q5.4 Q5.5 Q6.4 Q6.5 Q7.4 Q7.5 Q10.4 Q10.5 Q11.4 Q11.5 Q12.4 Q12.5 R47.2 SW1.3 SW1.4 SW2.1 SW2.3 SW2.4 U1.1 U1.10 U1.15 U1.29 U2.25 U3.11
copper on no net:
  other v1: 7403.35,31.65 7446.65,31.65 6888.35,206.65 6931.65,206.65 8223.35,381.65 8266.65,381.65 1313.35,6548.35 1356.65,6548.35 1313.35,6591.65 1356.65,6591.65 2543.35,7116.65 2586.65,7116.65 948.35,7316.65 991.65,7316.65 1218.35,7326.65 1261.65,7326.65

## Keep-outs
Keep-Out Layer:
  lines w10: 520,7525 1400,7525 3160,7525 ; 5210,3140 5210,-235 8730,-235 8730,3140 7850,3140